# EAGLE board nano24rf_403-10sa (EAGLE 6.6.0)
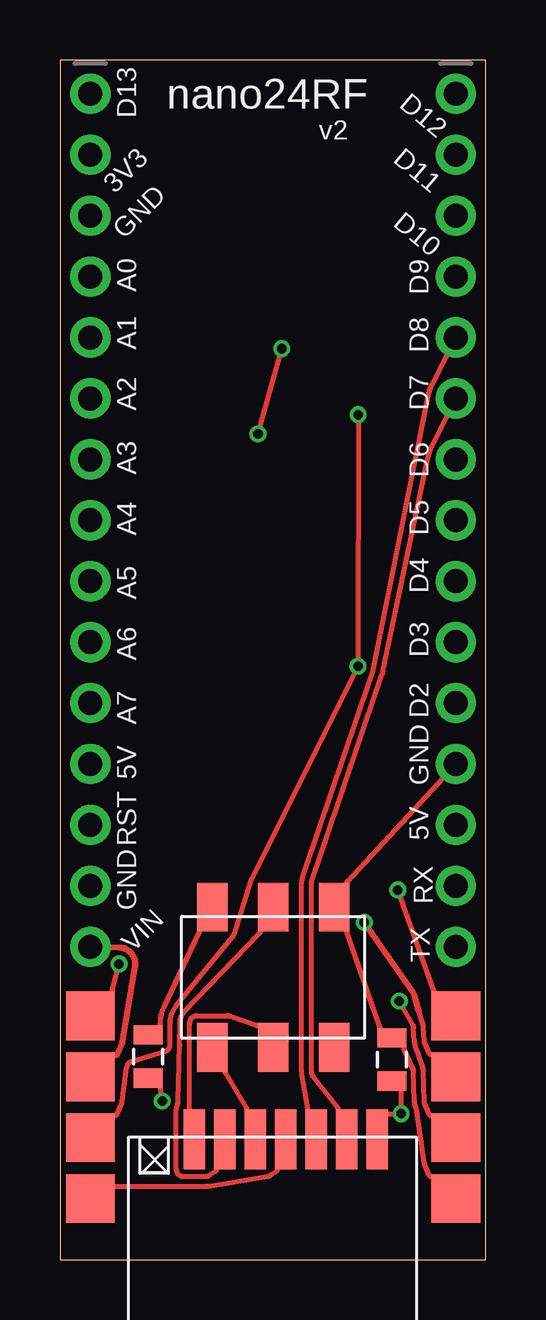
[diagram p0: board, top side]
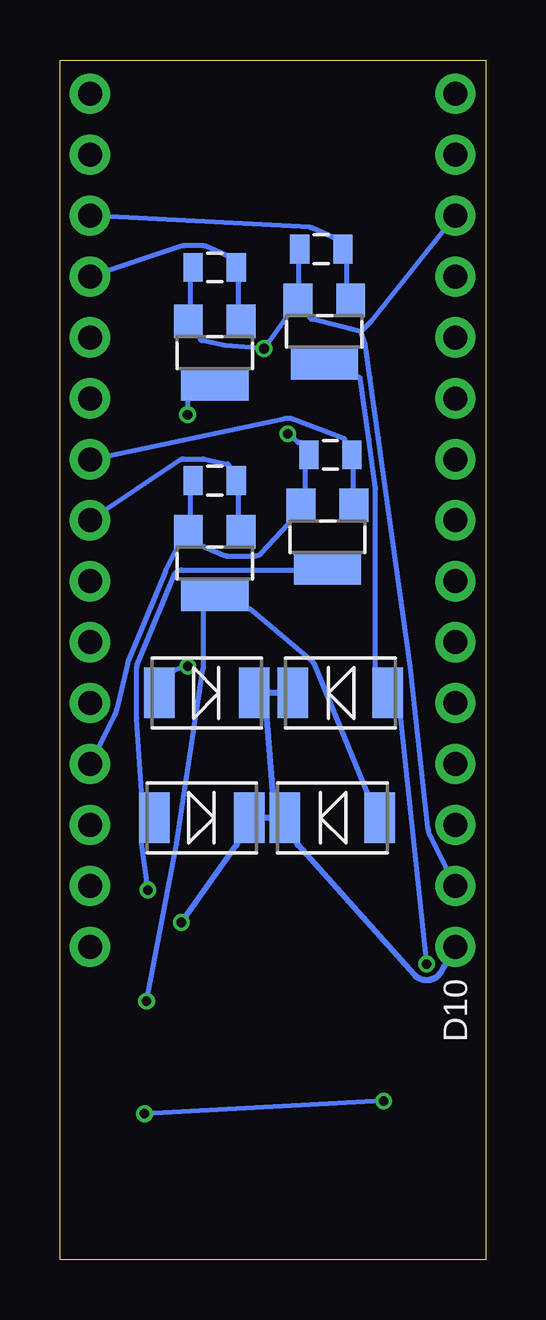
[diagram p1: board, bottom side, seen from below]

Size 17.76 x 50 mm. Coordinates in mm from the lower left corner, seen from the top.
Outline: 0,0 17.76,0 17.76,50 0,50 0,0
Copper layers 1+16: TOP 0.035mm / dielectric 0.15mm / BOTTOM 0.035mm
Design rules "default": minimum track width 7mil, minimum drill 0.6mm, track to track 8mil, track to pad 8mil, pad to pad 8mil, via to via 8mil, smd to smd 8mil, copper to edge 10mil, drill to drill 8mil, minimum pad ring 0.1mm, minimum via ring 0.1mm, stop-mask expansion 4mil, vias tented up to drill 0mil, thermal gap 10mil
Net classes: 0 default: width 0.178 mm, clearance 0.203 mm; 1 class_VIN: width 0.203 mm, clearance 0.203 mm to class 0, clearance 0.203 mm

## Footprints (pad centres in the part's own frame; a part is rotated, then mirrored left to right if it is on the bottom)
DO-214AC = smd 1.27 x 2.1: 1 -1.98,0; 2 1.98,0
1X15_ROUND_70 = drill 1 pad 1.676: 1 -17.78,0; 2 -15.24,0; 3 -12.7,0; 4 -10.16,0; 5 -7.62,0; 6 -5.08,0; 7 -2.54,0; 8 0,0; 9 2.54,0; 10 5.08,0; 11 7.62,0; 12 10.16,0; 13 12.7,0; 14 15.24,0; 15 17.78,0
2X03_SMT = smd 1.27 x 2.032: 1 -2.54,-2.921; 2 -2.54,2.921; 3 0,-2.921; 4 0,2.921; 5 2.54,-2.921; 6 2.54,2.921
SOT23-W = smd 1.2 x 1.4: 1 -1.1,-1.3; 2 1.1,-1.3 | smd 2.8 x 1.4: 3 0,1.3
0805 = smd 0.8 x 1.2: 1 -0.9,0; 2 0.9,0
FATPAD4 = smd 2.032 x 2.032: P$1 -3.81,0; P$2 -1.27,0; P$3 1.27,0; P$4 3.81,0
SMD1,27-2,54 = smd 0.9 x 2.5: 1 1.63,0.1; 2 2.9,0.1; 3 4.17,0.1; 4 5.44,0.1; 5 6.71,0.1; 6 7.98,0.1; 7 9.25,0.1

## Placement (x,y rotation side)
D1  [DO-214AC]  11.84,18.41 180 bottom
D2  [DO-214AC]  6.4,18.41 0 bottom
D3  [DO-214AC]  6.06,23.62 0 bottom
D4  [DO-214AC]  11.64,23.62 180 bottom
JP1  [1X15_ROUND_70]  1.27,30.81 270 top
JP2  [1X15_ROUND_70]  16.51,30.81 270 top
JP3  [2X03_SMT]  8.89,11.76 0 top
Q1  [SOT23-W]  6.6,30.13 180 bottom
Q2  [SOT23-W]  11.3,29.04 180 bottom
Q3  [SOT23-W]  6.73,38.69 180 bottom
Q4  [SOT23-W]  11.3,37.8 180 bottom
R1  [0805]  3.68,8.46 270 top
R2  [0805]  13.84,8.33 270 top
R3  [0805]  6.48,33.54 0 bottom
R4  [0805]  11.3,32.46 0 bottom
R5  [0805]  6.86,42.12 0 bottom
R6  [0805]  11.3,41.35 0 bottom
U$6  [FATPAD4]  1.27,6.35 270 top
U$7  [SMD1,27-2,54]  14.86,5.11 180 top
U$8  [FATPAD4]  16.51,6.35 270 top

## Library data of the parts
D1-D4 = dp_devices
JP1 JP2 = microbuilder
JP3 U$6-U$8 = nano24rf
Q1-Q4 = adafruit
R1-R6 = ATTAMI-V0.00

## Nets
3V3: JP1.2
5V: JP3.2 R1.1
CE: JP2.6 U$7.2
CSN: JP2.5 U$7.3
D3: JP2.10
D5: JP2.8 Q2.1 R4.2
D6: JP2.7 Q1.1 R3.2
D9: JP2.4 Q4.1 R6.2
D10: JP2.3 Q3.1 R5.2
FET01: D1.2 Q1.3 U$8.P$1
FET02: D2.2 Q2.3 U$8.P$3
FET03: D3.2 Q3.3 U$6.P$1
FET04: D4.2 Q4.3 U$6.P$3
GND: JP1.3 JP1.14 JP2.12 JP3.6 Q1.2 Q2.2 Q3.2 Q4.2 R2.1 R3.1 R4.1 R5.1 R6.1 U$8.P$4
MISO: JP3.1 U$7.5
MOSI: JP3.4 U$7.6
N$6: R1.2 R2.2 U$7.1
RST: JP3.5
S$1: U$6.P$4 U$7.4
SCK: JP3.3 U$7.7
SCL: JP1.9
SDA: JP1.8
VIN [class_VIN]: D1.1 D2.1 D3.1 D4.1 JP1.15 U$6.P$2 U$8.P$2

## Tracks (layer width: path | path; a pad name or v marks a point on that pad's centre or on a via)
5V
  TOP 0.203: R1.1 4.18,9.66 4.18,9.76 4.18,9.77 4.19,9.94 arc-22 4.33,10.51 5.81,13.62 arc25 5.82,13.67 5.82,13.77 JP3.2
CE
  TOP 0.203: U$7.2 11.61,6.16 11.61,6.26 arc38 11.59,6.32 10.55,7.64 arc-38 10.49,7.83 10.49,15.7 arc-19 10.51,15.8 13.44,24.38 arc7 13.47,24.51 15.39,33.59 arc-15 15.49,33.87 JP2.6
CSN
  TOP 0.203: U$7.3 10.34,6.16 10.34,6.26 arc10 10.34,6.28 10.09,7.71 arc-10 10.08,7.83 10.08,15.7 arc-19 10.12,15.93 13.05,24.52 arc7 13.07,24.6 15.39,36.12 arc-15 15.49,36.41 JP2.5
D5
  BOTTOM 0.203: Q2.1 10.3,30.93 10.3,31.04 10.3,31.86 10.3,31.97 R4.2 10.7,32.96 10.7,33.06 arc-78 10.78,33.16 11.74,33.36 arc-12 11.8,33.37 12.6,33.37 arc-34 12.77,33.32 JP2.8
D6
  BOTTOM 0.203: JP2.7 8.39,35.06 arc33 8.03,35.03 5.94,34.24 arc69 5.88,34.14 5.88,34.04 R3.2 5.54,33.05 5.54,32.94 5.54,32.13 5.54,32.03 Q1.1
D9
  BOTTOM 0.203: Q4.1 10.3,39.7 10.3,39.8 10.3,40.75 10.3,40.86 R6.2 10.7,41.85 10.8,41.85 arc24 10.84,41.86 11.68,42.23 arc-24 11.8,42.26 12.6,42.26 arc-18 12.7,42.24 JP2.4
D10
  BOTTOM 0.203: Q3.1 5.79,40.59 5.79,40.69 5.79,41.52 5.79,41.62 R5.2 6.26,42.61 6.36,42.61 arc24 6.4,42.62 7.23,42.99 arc-21 7.34,43.02 JP2.3
FET01  (via drill 0.4 pad 0.7)
  TOP 0.203: U$8.P$1 15.6,11.07 15.6,11.18 arc11 15.59,11.2 v14.09,15.4
  BOTTOM 0.203: v14.09,15.4 14.36,17.34 arc-11 14.36,17.36 14.36,17.47 D1.2 14.36,19.36 14.36,19.46 14.36,19.47 14.56,22.55 arc4 14.56,22.57 14.56,24.67 arc22 14.53,24.79 12.98,28.55 arc68 12.7,28.74 7.9,28.74 Q1.3
FET02  (via drill 0.4 pad 0.7)
  TOP 0.203: U$8.P$3 15.6,5.99 15.49,5.99 arc-66 15.4,6.05 15.21,6.48 arc-22 15.19,6.6 15.15,7.85 arc18 15.12,8.07 14.82,8.91 arc-16 14.78,9.1 14.75,9.65 arc26 14.71,9.79 v14.15,10.77
  BOTTOM 0.203: v14.15,10.77 12.89,17.31 arc-2 12.89,17.32 11.78,24.63 arc-9 11.78,24.73 11.78,27.04 11.78,27.14 Q2.3 10.01,27.14 9.9,27.14 arc40 9.84,27.11 7.21,24.91 arc28 7.13,24.79 4.96,19.5 arc22 4.95,19.46 4.95,19.36 D2.2
FET03  (via drill 0.4 pad 0.7)
  TOP 0.203: U$6.P$1 2.18,11.07 2.18,11.18 arc-14 2.19,11.2 v2.46,12.32
  BOTTOM 0.203: v2.46,12.32 3.55,22.56 arc6 3.55,22.57 3.55,22.67 D3.2 4.6,24.57 4.6,24.67 4.6,32.13 arc-8 4.6,32.17 4.88,34.19 5.23,36.7 arc-82 5.33,36.79 5.43,36.79 Q3.3
FET04  (via drill 0.4 pad 0.7)
  TOP 0.203: v12.44,35.22 v12.43,24.73 7.98,15.84 arc9 7.96,15.79 7.28,13.58 arc-22 7.22,13.47 4.85,10.56 arc39 4.6,9.87 4.59,8.96 arc-73 4.37,8.67 3,8.25 arc66 2.78,8 2.59,6.56 arc-16 2.57,6.48 2.38,6.05 arc-66 2.29,5.99 2.18,5.99 U$6.P$3
  BOTTOM 0.203: Q4.3 12.44,35.9 v12.44,35.22 | v12.43,24.73 12.95,24.57 arc16 12.98,24.57 13.08,24.57 D4.2
GND  (via drill 0.4 pad 0.7)
  TOP 0.203: v8.26,34.42 v9.25,37.97 | JP2.12 11.99,15.77 arc43 11.96,15.7 11.96,15.6 JP3.6 11.96,13.77 11.96,13.67 arc19 11.97,13.63 13.34,9.67 arc-19 13.35,9.63 13.35,9.53 R2.1 14.34,8.94 14.34,8.83 arc24 14.35,8.79 14.72,7.96 arc-22 14.75,7.84 14.78,6.58 arc21 14.84,6.33 14.84,6.33 arc-14 14.88,6.17 15.19,4.02 arc15 15.21,3.94 15.4,3.52 arc66 15.49,3.45 15.6,3.45 U$8.P$4
  BOTTOM 0.203: R6.1 12.3,40.86 12.3,39.7 Q4.2 11.9,38.5 11.9,38.4 arc-78 11.82,38.3 10.87,38.1 10.86,38.1 v9.25,37.97 8.35,39.22 arc-40 8.33,39.29 8.33,39.39 Q3.2 | Q2.2 12.3,30.93 12.3,31.97 R4.1 | JP1.3 4.79,39.1 arc6 4.81,39.07 5.21,38.67 | 5.21,38.67 7.26,39.19 arc76 7.33,39.29 7.33,39.39 Q3.2 | Q2.2 12.9,29.74 12.9,29.64 arc27 12.91,29.59 13.34,28.76 arc-5 13.36,28.71 14.91,24.94 arc-9 14.94,24.84 15.4,22.93 arc13 15.49,22.68 JP2.12 | JP1.14 2.29,17.6 arc20 2.41,17.99 3.15,24.7 3.15,24.71 4.47,34.24 4.83,36.76 5.03,38.13 arc-11 5.04,38.19 5.21,38.67 | Q3.2 7.79,40.59 7.79,41.62 R5.1 | v8.26,34.42 7.84,34.07 arc-40 7.78,34.04 7.67,34.04 R3.1 7.54,33.05 7.54,32.03 Q1.2 8.2,30.83 8.2,30.73 arc43 8.23,30.66 9.38,29.43 arc47 9.6,29.33 10.8,29.33 arc24 10.93,29.36 11.76,29.73 arc-24 11.8,29.74 11.9,29.74 Q2.2
MISO
  TOP 0.203: U$7.5 7.8,6.16 7.8,6.26 arc31 7.79,6.31 6.9,7.77 arc-31 6.88,7.83 6.88,7.93 JP3.1
MOSI
  TOP 0.203: U$7.6 6.53,3.86 6.53,3.76 arc-57 6.49,3.68 6.23,3.51 arc-33 6.06,3.46 5.16,3.46 arc-90 4.85,3.76 4.85,6.26 arc-21 4.87,6.37 4.88,6.37 arc19 4.92,6.59 5,8.94 arc1 5,8.96 5,9.86 arc-43 5.2,10.35 8.33,13.6 arc44 8.36,13.67 8.36,13.77 JP3.4
N$6  (via drill 0.4 pad 0.7)
  TOP 0.203: R2.2 14.23,7.14 14.23,7.03 v14.23,6.08 13.68,6.08 13.58,6.08 U$7.1 | R1.2 4.18,7.26 4.18,7.16 arc9 4.18,7.15 v4.26,6.61
  BOTTOM 0.203: v4.26,6.61 v14.23,6.08
S$1
  TOP 0.203: U$6.P$4 2.18,3.05 2.29,3.05 6.06,3.05 arc9 6.17,3.06 8.65,3.46 arc24 8.77,3.51 9.03,3.68 arc57 9.07,3.76 9.07,3.86 U$7.4
SCK
  TOP 0.203: U$7.7 5.41,6.16 5.41,6.26 5.41,9.86 arc-90 5.71,10.16 6.99,10.16 arc-19 7.08,10.15 8.22,9.76 arc19 8.26,9.76 8.36,9.76 JP3.3
VIN  (via drill 0.4 pad 0.7)
  TOP 0.203: U$8.P$2 15.6,8.53 15.49,8.53 arc-66 15.4,8.6 15.21,9.02 arc-20 15.19,9.12 15.15,9.68 arc12 15.13,9.83 14.98,10.35
  TOP 0.254: 14.98,10.35 14.8,10.96 arc19 14.71,11.16 v12.69,14.05 | U$6.P$2 2.16,8.51 2.29,8.51 arc66 2.4,8.59 2.59,9.01 arc14 2.61,9.09 3.14,12.21 arc98 2.48,13 JP1.15
  BOTTOM 0.254: v12.69,14.05 10.39,17.29 arc-35 10.37,17.36 10.37,17.49 D1.1 9.36,18.41 9.23,18.41 9.01,18.41 8.89,18.41 D2.1 | JP1.15 1.87,11.98 arc108 2.97,11.86 7.84,17.28 arc42 7.87,17.36 7.87,17.49 D2.1 | D3.1 8.55,23.62 8.68,23.62 9.02,23.62 9.15,23.62 D4.1 9.15,22.7 9.15,22.57 arc-5 9.15,22.56 8.89,19.48 arc5 8.89,19.46 8.89,19.34 D2.1

## Text on the board
tPlace: D13 | nano24RF | v2 | D12 | D11 | 3V3 | GND | D10 | A0 | D9 | A1 | D8 | A2 | D7 | A3 | D6 | A4 | D5 | A5 | D4 | A6 | D3 | D2 | A7 | 5V | GND | RST | 5V | GND | VIN | RX | TX
bPlace: D10
bValues: D6 | D9 | D5